# EAGLE board Prática 08 (EAGLE 9.7.0)

Size 171.74 x 40.7 mm. Coordinates in mm from the lower left corner, seen from the top.
Outline: 0,0 171.74,0 171.74,40.7 0,40.7 0,0
Copper layers (1*16): Top 0.035mm / dielectric 1.5mm / Bottom 0.035mm
Design rules "default": minimum track width 6mil, minimum drill 0.35mm, track to track 6mil, track to pad 6mil, pad to pad 6mil, via to via 6mil, smd to smd 6mil, copper to edge 40mil, drill to drill 6mil, minimum pad ring 10mil, minimum via ring 8mil, stop-mask expansion 4mil, vias tented up to drill 0mil, thermal gap 10mil

## Footprints (pad centres in the part's own frame; a part is rotated, then mirrored left to right if it is on the bottom)
CAPPRD254W65D500H1150B = drill 0.85 pad 1.45: 1 -1.27,0; 2 1.27,0
LEDRD254W60D565H860B = drill 0.981 pad 1.581: 1 -1.27,0; 2 1.27,0
BATTERY-GENERIC = drill 1.118 pad 3.15 octagon: + 2.54,0; - -2.54,0
RESAD1016W63L850D250B = drill 0.83 pad 1.43: 1 -5.08,0; 2 5.08,0
78B04ST = drill 0.8: 1 -3.81,-3.81; 2 -1.27,-3.81; 3 1.27,-3.81; 4 3.81,-3.81; 5 3.81,3.81; 6 1.27,3.81; 7 -1.27,3.81; 8 -3.81,3.81
DIP762W53P254L1969H508Q14B = drill 0.743 pad 1.343: 1 -3.81,7.62; 2 -3.81,5.08; 3 -3.81,2.54; 4 -3.81,0; 5 -3.81,-2.54; 6 -3.81,-5.08; 7 -3.81,-7.62; 8 3.81,-7.62; 9 3.81,-5.08; 10 3.81,-2.54; 11 3.81,0; 12 3.81,2.54; 13 3.81,5.08; 14 3.81,7.62
DIP826W53P254L959H508Q8B = drill 0.786 pad 1.386: 1 -4.13,3.81; 2 -4.13,1.27; 3 -4.13,-1.27; 4 -4.13,-3.81; 5 4.13,-3.81; 6 4.13,-1.27; 7 4.13,1.27; 8 4.13,3.81

## Placement (x,y rotation side)
C1  47u  [CAPPRD254W65D500H1150B]  139.01,8.87 180 top
D1  RED  [LEDRD254W60D565H860B]  165.68,11.41 180 top
P2  BATTERYGENERIC  [BATTERY-GENERIC]  8.26,22.94 180 top
R2  10k  [RESAD1016W63L850D250B]  39.95,31.73 90 top
R3  200  [RESAD1016W63L850D250B]  156.79,6.33 0 top
R4  10k  [RESAD1016W63L850D250B]  154.25,26.65 0 top
R8  10k  [RESAD1016W63L850D250B]  144.09,24.11 0 top
SW2  SPST-478B04ST  [78B04ST]  43.76,15.22 0 top
U7  74HC04_PDIP  [DIP762W53P254L1969H508Q14B]  60.27,15.22 90 top
U8  74HC08_PDIP  [DIP762W53P254L1969H508Q14B]  80.59,15.22 90 top
U9  74HC32_PDIP  [DIP762W53P254L1969H508Q14B]  100.91,15.22 90 top
U10  74HC74_PDIP  [DIP762W53P254L1969H508Q14B]  123.77,15.22 90 top
U11  LM555_DIP  [DIP826W53P254L959H508Q8B]  150.44,15.22 90 top

## Library data of the parts
C1 P2 R2-R4 R8 SW2 U7-U10 = Tinkercad
D1 = Tinkercad; CATEGORY: Opto-Electronic; SUB-CATEGORY: LED; VALUE: LED_RED
U11 = Tinkercad; CATEGORY: IC_Clock-Timing; CURRENT-SUPPLY: 10mA; DESCRIPTION: IC OSC SINGLE TIMER 100KHZ 8-DIP; FREQUENCY: 100kHz; MANUFACTURER: Texas Instruments; MPN: LM555CN/NOPB; OPERATING_TEMP: 0°C to 70°C; PART_STATUS: Active; ROHS_COMPLIANT: ROHS3 Compliant; SUB-CATEGORY: Timer

## Nets
D1_A: D1.1 R3.2
P2+: P2.+ R2.2 R8.1 U7.14 U8.14 U9.14 U10.1 U10.4 U10.10 U10.13 U10.14 U11.4 U11.8
P2-: C1.2 D1.2 P2.- U7.7 U8.7 U9.7 U10.7 U11.1
SW2_8: R2.1 SW2.8
U8_1Y: U8.3 U9.1
U8_2A: SW2.1 U7.1 U8.4 U8.9
U8_2Y: U8.6 U9.2
U8_3Y: U8.8 U9.13
U8_4A: U8.5 U8.12 U10.9
U8_4B: U7.2 U8.1 U8.13
U9_1Y: U9.3 U10.2
U9_4A: U8.11 U9.12
U10_1!Q: U8.10 U10.6
U10_1Q: U8.2 U10.5
U10_CLK2: R3.1 U10.3 U10.11 U11.3
U10_D2: U9.11 U10.12
U11_DIS: R4.1 R8.2 U11.7
U11_THR: C1.1 U11.2 U11.6

## Tracks (layer width: path | path; a pad name or v marks a point on that pad's centre or on a via)
D1_A  (1 unrouted)
P2+  (12 unrouted)
P2-  (7 unrouted)
SW2_8  (1 unrouted)
U8_1Y  (1 unrouted)
U8_2A  (3 unrouted)
U8_2Y  (1 unrouted)
U8_3Y  (1 unrouted)
U8_4A  (2 unrouted)
U8_4B  (2 unrouted)
U9_1Y  (1 unrouted)
U9_4A  (1 unrouted)
U10_1!Q  (1 unrouted)
U10_1Q  (1 unrouted)
U10_CLK2  (3 unrouted)
U10_D2  (1 unrouted)
U11_DIS  (2 unrouted)
U11_THR  (2 unrouted)